# EAGLE board Shopfloor HP Molex NEW (EAGLE 9.6.2)
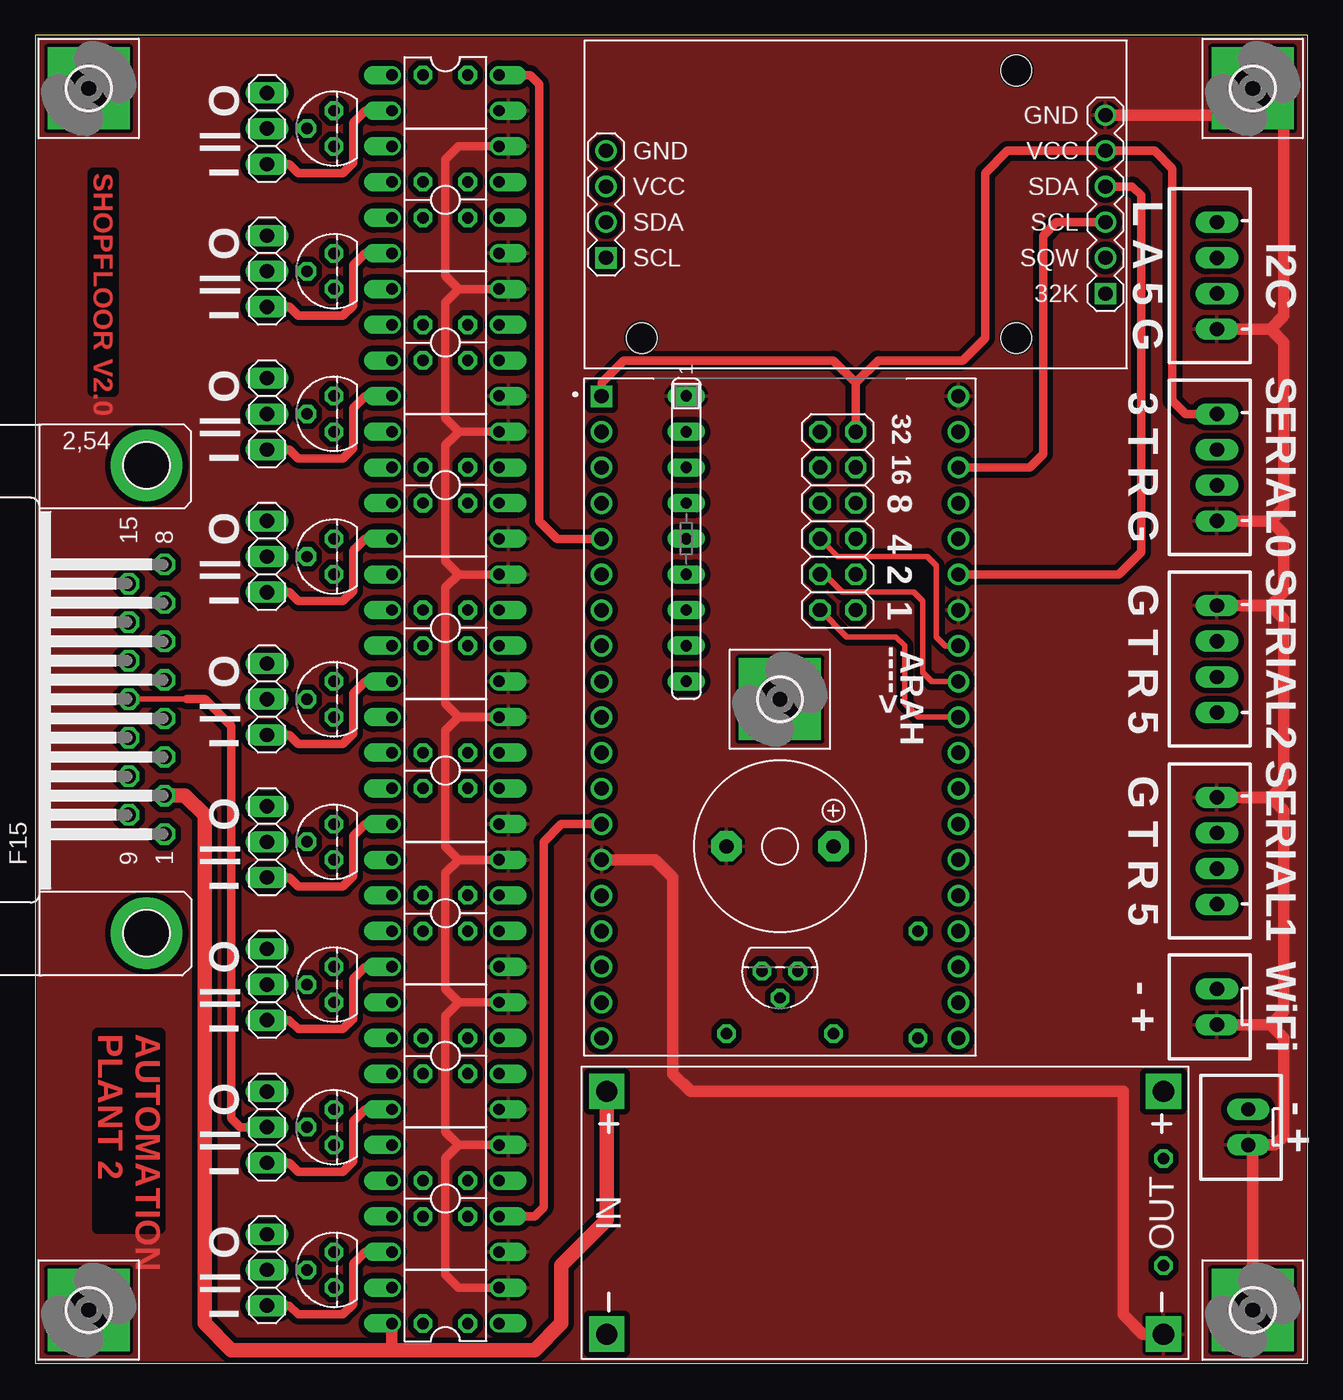
[diagram p0: board, top side]
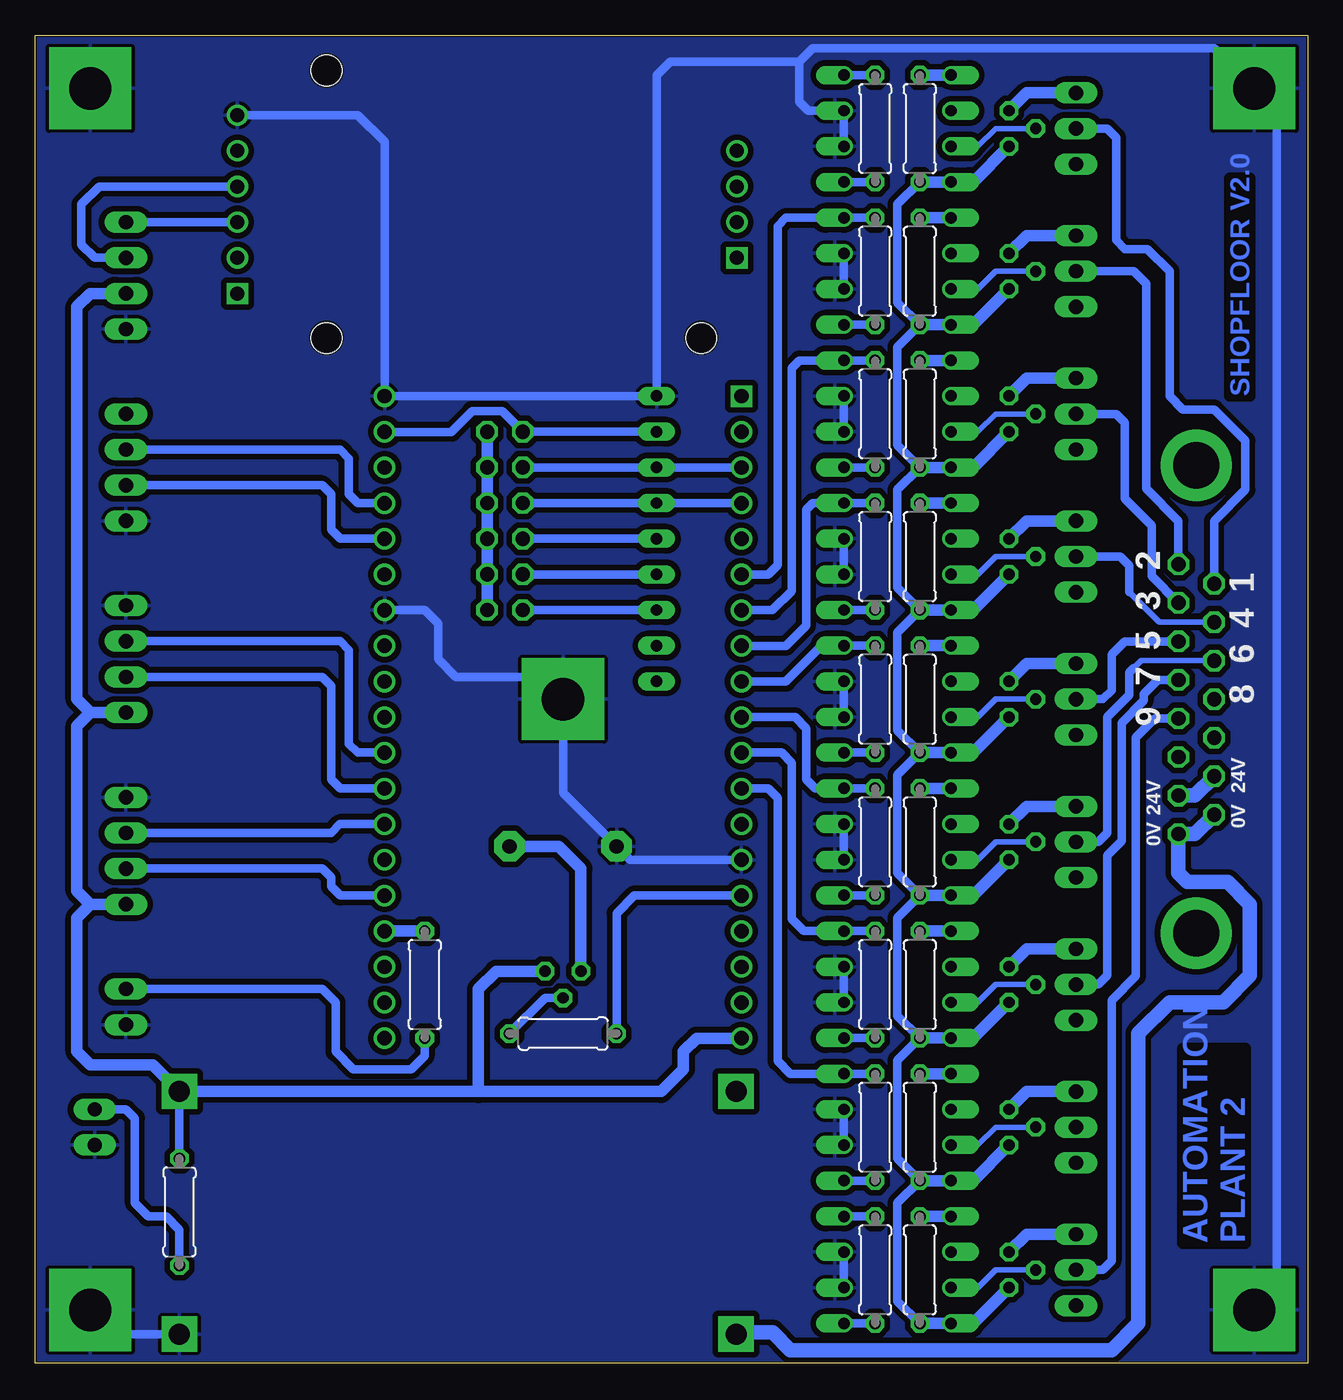
[diagram p1: board, bottom side, seen from below]

Size 90.6 x 94.6 mm. Coordinates in mm from the lower left corner, seen from the top.
Outline: 0,0 90.6,0 90.6,94.6 0,94.6 0,0
Copper layers (1*16): Top 0.035mm / dielectric 1.5mm / Bottom 0.035mm
Design rules "default *": minimum track width 6mil, minimum drill 0.35mm, track to track 16mil, track to pad 16mil, pad to pad 16mil, via to via 16mil, smd to smd 18mil, copper to edge 5mil, drill to drill 6mil, minimum pad ring 10mil, minimum via ring 8mil, stop-mask expansion 4mil, vias tented up to drill 0mil, thermal gap 10mil

## Footprints (pad centres in the part's own frame; a part is rotated, then mirrored left to right if it is on the bottom)
3,0-PAD-SQUARE = drill 3 pad 5.842 square: B3,0 0,0
1X03 = drill 1.016 long: 1 -2.54,0; 2 0,0; 3 2.54,0
2X06 = drill 1.016 octagon: 1 -6.35,-1.27; 2 -6.35,1.27; 3 -3.81,-1.27; 4 -3.81,1.27; 5 -1.27,-1.27; 6 -1.27,1.27; 7 1.27,-1.27; 8 1.27,1.27; 9 3.81,-1.27; 10 3.81,1.27; 11 6.35,-1.27; 12 6.35,1.27
DIL04 = drill 0.813 offset: 1 -1.27,-3.81; 2 1.27,-3.81; 3 1.27,3.81; 4 -1.27,3.81
TO92 = drill 0.813 octagon: 1 1.27,0; 2 0,1.905; 3 -1.27,0
0207/7 = drill 0.813 octagon: 1 -3.81,0; 2 3.81,0
SIL9 = drill 0.813 long: 1 -10.16,0; 2 -7.62,0; 3 -5.08,0; 4 -2.54,0; 5 0,0; 6 2.54,0; 7 5.08,0; 8 7.62,0; 9 10.16,0
F/TMB = drill 1.016 pad 2.159 octagon: + 3.81,0; - -3.81,0
MODULE_ESP32-DEVKITC-32U = drill 1.02 square: 1 -12.7,22.85 | drill 1.02: 2 -12.7,20.31; 3 -12.7,17.77; 4 -12.7,15.23; 5 -12.7,12.69; 6 -12.7,10.15; 7 -12.7,7.61; 8 -12.7,5.07; 9 -12.7,2.53; 10 -12.7,-0.01; 11 -12.7,-2.55; 12 -12.7,-5.09; 13 -12.7,-7.63; 14 -12.7,-10.17; 15 -12.7,-12.71; 16 -12.7,-15.25; 17 -12.7,-17.79; 18 -12.7,-20.33; 19 -12.7,-22.87; 20 12.7,-22.87; 21 12.7,-20.33; 22 12.7,-17.79; 23 12.7,-15.25; 24 12.7,-12.71; 25 12.7,-10.17; 26 12.7,-7.63; 27 12.7,-5.09; 28 12.7,-2.55; 29 12.7,-0.01; 30 12.7,2.53; 31 12.7,5.07; 32 12.7,7.61; 33 12.7,10.15; 34 12.7,12.69; 35 12.7,15.23; 36 12.7,17.77; 37 12.7,20.31; 38 12.7,22.85
DC-DC-STEP-DOWN-LM2596 = drill 1.5 pad 2.5 square: IN+ -19.812,8.636; IN- -19.812,-8.636; OUT+ 19.812,8.636; OUT- 19.812,-8.636
RTC-DS3231-AT24C32 = drill 1 square: J1.1 -17.78,6.35; J2.1 17.78,3.81 | drill 1: J1.2 -17.78,3.81; J1.3 -17.78,1.27; J1.4 -17.78,-1.27; J1.5 -17.78,-3.81; J1.6 -17.78,-6.35; J2.2 17.78,1.27; J2.3 17.78,-1.27; J2.4 17.78,-3.81 | hole 2.2: -11.43,-9.525; -11.43,9.525; 15.24,9.525
F15HP = drill 1.016 octagon: 1 -9.601,-1.27; 2 -6.858,-1.27; 3 -4.115,-1.27; 4 -1.372,-1.27; 5 1.372,-1.27; 6 4.115,-1.27; 7 6.858,-1.27; 8 9.601,-1.27; 9 -8.23,1.27; 10 -5.486,1.27; 11 -2.743,1.27; 12 0,1.27; 13 2.743,1.27; 14 5.486,1.27; 15 8.23,1.27 | drill 3.302 pad 5.08: G1 -16.662,0; G2 16.662,0
JST-XH-04-PACKAGE-LONG-PAD = drill 1.016 long: 1 -3.81,0; 2 -1.27,0; 3 1.27,0; 4 3.81,0
JST-XH-02-PACKAGE-LONG-PAD = drill 1.016 long: 1 -1.27,0; 2 1.27,0

## Placement (x,y rotation side)
H1  MOUNT-PAD-SQUARE3.0  [3,0-PAD-SQUARE]  3.81,3.81 0 top
H2  MOUNT-PAD-SQUARE3.0  [3,0-PAD-SQUARE]  3.81,90.81 0 top
H3  MOUNT-PAD-SQUARE3.0  [3,0-PAD-SQUARE]  53.02,47.31 0 top
H4  MOUNT-PAD-SQUARE3.0  [3,0-PAD-SQUARE]  86.68,3.81 0 top
H5  MOUNT-PAD-SQUARE3.0  [3,0-PAD-SQUARE]  86.68,90.81 0 top
JP1  [1X03]  16.51,77.79 270 top
JP2  [2X06]  57.15,60.01 90 top
JP3  [1X03]  16.51,57.47 270 top
JP5  [1X03]  16.51,37.15 270 top
JP6  [1X03]  16.51,16.83 270 top
JP8  [1X03]  16.51,87.95 270 top
JP9  [1X03]  16.51,67.63 270 top
JP10  [1X03]  16.51,47.31 270 top
JP11  [1X03]  16.51,26.99 270 top
JP12  [1X03]  16.51,6.67 270 top
OK5  PC817  [DIL04]  29.21,75.25 90 top
OK6  PC817  [DIL04]  29.21,80.33 270 top
OK7  PC817  [DIL04]  29.21,54.93 90 top
OK8  PC817  [DIL04]  29.21,60.01 270 top
OK9  PC817  [DIL04]  29.21,34.61 90 top
OK10  PC817  [DIL04]  29.21,39.69 270 top
OK11  PC817  [DIL04]  29.21,14.29 90 top
OK12  PC817  [DIL04]  29.21,19.37 270 top
OK17  PC817  [DIL04]  29.21,85.41 90 top
OK18  PC817  [DIL04]  29.21,90.49 270 top
OK19  PC817  [DIL04]  29.21,65.09 90 top
OK20  PC817  [DIL04]  29.21,70.17 270 top
OK21  PC817  [DIL04]  29.21,44.77 90 top
OK22  PC817  [DIL04]  29.21,49.85 270 top
OK23  PC817  [DIL04]  29.21,24.45 90 top
OK24  PC817  [DIL04]  29.21,29.53 270 top
OK25  PC817  [DIL04]  29.21,4.13 90 top
OK26  PC817  [DIL04]  29.21,9.21 270 top
Q2  BC337  [TO92]  21.27,77.79 90 top
Q3  BC337  [TO92]  21.27,57.47 90 top
Q4  BC337  [TO92]  21.27,37.15 90 top
Q5  BC337  [TO92]  21.27,16.83 90 top
Q6  BC337  [TO92]  53.02,27.94 180 top
Q7  BC337  [TO92]  21.27,87.95 90 top
Q8  BC337  [TO92]  21.27,67.63 90 top
Q9  BC337  [TO92]  21.27,47.31 90 top
Q10  BC337  [TO92]  21.27,26.99 90 top
Q11  BC337  [TO92]  21.27,6.67 90 top
R1  1K  [0207/7]  80.33,10.79 270 bottom
R3  4K7  [0207/7]  27.62,77.79 90 bottom
R4  330  [0207/7]  30.8,57.47 90 bottom
R5  4K7  [0207/7]  27.62,57.47 90 bottom
R6  330  [0207/7]  30.8,37.15 90 bottom
R7  4K7  [0207/7]  27.62,37.15 90 bottom
R8  330  [0207/7]  30.8,16.83 90 bottom
R9  4K7  [0207/7]  27.62,16.83 90 bottom
R10  560  [0207/7]  53.02,23.5 0 bottom
R11  1K  [0207/7]  62.87,26.99 270 bottom
R14  330  [0207/7]  30.8,87.95 90 bottom
R15  4K7  [0207/7]  27.62,87.95 90 bottom
R16  330  [0207/7]  30.8,67.63 90 bottom
R17  4K7  [0207/7]  27.62,67.63 90 bottom
R18  330  [0207/7]  30.8,47.31 90 bottom
R19  4K7  [0207/7]  27.62,47.31 90 bottom
R20  330  [0207/7]  30.8,26.99 90 bottom
R22  4K7  [0207/7]  27.62,26.99 90 bottom
R23  330  [0207/7]  30.8,6.67 90 bottom
R24  4K7  [0207/7]  27.62,6.67 90 bottom
R28  330  [0207/7]  30.8,77.79 90 bottom
RN3  [SIL9]  46.35,58.74 270 top
SG1  F/TMB  [F/TMB]  53.02,36.83 0 top
U1  ESP32-DEVKITC-32U  [MODULE_ESP32-DEVKITC-32U]  53.02,46.04 0 top
U$1  DC-DC-STEP-DOWN-LM2596  [DC-DC-STEP-DOWN-LM2596]  60.52,10.73 0 top
U$3  RTC-DS3231-AT24C32  [RTC-DS3231-AT24C32]  58.42,82.55 180 top
X1  [F15HP]  7.94,47.31 90 top
X2  JST-XH-04-PIN-LONG-PAD  [JST-XH-04-PACKAGE-LONG-PAD]  84.14,77.47 90 top
X3  JST-XH-04-PIN-LONG-PAD  [JST-XH-04-PACKAGE-LONG-PAD]  84.14,63.82 90 top
X4  JST-XH-04-PIN-LONG-PAD  [JST-XH-04-PACKAGE-LONG-PAD]  84.14,50.16 90 top
X5  JST-XH-04-PIN-LONG-PAD  [JST-XH-04-PACKAGE-LONG-PAD]  84.14,36.51 90 top
X6  JST-XH-02-PIN-LONG-PAD  [JST-XH-02-PACKAGE-LONG-PAD]  84.14,25.4 90 top
X7  JST-XH-02-PIN-LONG-PAD  [JST-XH-02-PACKAGE-LONG-PAD]  86.36,16.83 90 top

## Library data of the parts
H1-H5 = holes
JP1-JP3 JP5 JP6 JP8-JP12 = pinhead
OK5-OK12 OK17-OK26 = optocoupler; MPN: PC817X4J000F; OC_FARNELL: 9707727; OC_NEWARK: 97K7059
Q2-Q11 = transistor-npn
R1 R3-R11 R14-R20 R22-R24 R28 = rcl; SPICEPREFIX: R
RN3 = resistor-sil; OC_FARNELL: unknown; OC_NEWARK: unknown
SG1 = buzzer; OC_FARNELL: unknown; OC_NEWARK: unknown
U1 = ESP32-DEVKITC-32U; AVAILABILITY: In Stock; DESCRIPTION: ESP32-WROOM-32UE - Transceiver; 802.11 b/g/n (Wi-Fi, WiFi, WLAN), Bluetooth® Smart Ready 4.x Dual Mode Evaluation Board; MF: Espressif Systems; MP: ESP32-DEVKITC-32U; PACKAGE: None; PRICE: None
U$1 = diy-modules
U$3 = diy-modules-ori
X1 = con-subd; OC_FARNELL: unknown; OC_NEWARK: unknown
X2-X7 = Rembrandt Electronics - JST XH Connectors v1-0

## Nets
0V: U$1.IN- X1.1 X1.9
+3V3: JP2.1 JP2.3 JP2.5 JP2.7 JP2.9 JP2.11 U1.1 U$3.J1.5 X3.4
+5V: Q6.3 R1.1 U1.19 U$1.OUT+ X2.2 X4.1 X5.1
+24V: OK5.4 OK7.4 OK9.4 OK11.4 OK17.4 OK19.4 OK21.4 OK23.4 OK25.4 Q2.3 Q3.3 Q4.3 Q5.3 Q7.3 Q8.3 Q9.3 Q10.3 Q11.3 R3.1 R5.1 R7.1 R9.1 R15.1 R17.1 R19.1 R22.1 R24.1 U$1.IN+ X1.2 X1.10
GND: H1.B3,0 H2.B3,0 H3.B3,0 H4.B3,0 H5.B3,0 OK5.2 OK6.3 OK7.2 OK8.3 OK9.2 OK10.3 OK11.2 OK12.3 OK17.2 OK18.3 OK19.2 OK20.3 OK21.2 OK22.3 OK23.2 OK24.3 OK25.2 OK26.3 RN3.1 SG1.- U1.14 U1.32 U1.38 U$1.OUT- U$3.J1.6 X2.1 X3.1 X4.4 X5.4 X6.1 X7.1
GND.2: U$3.J2.4
N$1: U1.35 X3.3
N$2: JP2.12 RN3.2 U1.37
N$3: R11.2 X6.2
N$4: JP1.2 X1.8
N$5: U1.27 X4.2
N$6: JP2.10 RN3.3 U1.3
N$7: JP2.8 RN3.4 U1.4
N$8: JP2.6 RN3.5 U1.31
N$9: U1.26 X5.3
N$10: U1.24 X5.2
N$11: R11.1 U1.23
N$12: Q6.2 R10.1
N$13: JP2.4 RN3.6 U1.30
N$14: Q6.1 SG1.+
N$15: JP8.2 X1.15
N$16: R1.2 X7.2
N$17: JP2.2 RN3.7 U1.29
N$19: OK6.4 R28.2 U1.6
N$20: OK20.4 R16.2 U1.7
N$21: OK8.4 R4.2 U1.8
N$22: OK22.4 R18.2 U1.9
N$23: OK10.4 R6.2 U1.10
N$24: OK24.4 R20.2 U1.11
N$25: U1.28 X4.3
N$26: OK12.4 R8.2 U1.12
N$27: U1.33 U$3.J1.4 X2.3
N$28: OK26.4 R23.2 U1.13
N$29: U1.36 U$3.J1.3 X2.4
N$30: R10.2 U1.15
N$31: OK5.1 R28.1
N$32: OK5.3 Q2.2
N$33: OK6.1 R3.2
N$34: JP1.1 Q2.1
N$35: JP1.3 OK6.2
N$36: JP9.2 X1.7
N$37: OK7.1 R4.1
N$38: OK7.3 Q3.2
N$39: OK8.1 R5.2
N$40: JP3.1 Q3.1
N$41: JP3.3 OK8.2
N$42: JP10.2 X1.6
N$43: OK9.1 R6.1
N$44: OK9.3 Q4.2
N$45: OK10.1 R7.2
N$46: U1.34 X3.2
N$47: JP5.1 Q4.1
N$48: JP5.3 OK10.2
N$49: JP11.2 X1.5
N$50: OK11.1 R8.1
N$51: OK11.3 Q5.2
N$52: OK12.1 R9.2
N$53: JP6.1 Q5.1
N$54: JP6.3 OK12.2
N$55: OK18.4 R14.2 U1.5
N$56: JP12.2 X1.4
N$63: OK17.1 R14.1
N$64: OK17.3 Q7.2
N$65: OK18.1 R15.2
N$66: JP8.1 Q7.1
N$68: JP8.3 OK18.2
N$69: JP6.2 X1.12
N$70: OK19.1 R16.1
N$71: OK19.3 Q8.2
N$72: OK20.1 R17.2
N$73: JP9.1 Q8.1
N$74: JP9.3 OK20.2
N$75: JP5.2 X1.13
N$76: OK21.1 R18.1
N$77: OK21.3 Q9.2
N$78: OK22.1 R19.2
N$79: JP10.1 Q9.1
N$80: JP10.3 OK22.2
N$81: JP3.2 X1.14
N$82: OK23.1 R20.1
N$83: OK23.3 Q10.2
N$84: OK24.1 R22.2
N$85: JP11.1 Q10.1
N$86: JP11.3 OK24.2
N$88: OK25.1 R23.1
N$89: OK25.3 Q11.2
N$90: OK26.1 R24.2
N$91: JP12.1 Q11.1
N$92: JP12.3 OK26.2
VCC.2: U$3.J2.3

## Tracks (layer width: path | path; a pad name or v marks a point on that pad's centre or on a via)
0V
  Bottom 1.016: X1.9 8.04,37.71 X1.1 9.21,34.92 8.57,34.29 5.71,34.29 4.13,32.7 4.13,27.62 6.03,25.72 9.84,25.72 12.06,23.5 12.06,2.86 13.97,0.95 36.83,0.95 38.1,2.22 40.58,2.22 U$1.IN-
+3V3
  Top 0.61: U1.1 40.32,69.85 41.91,71.44 56.83,71.44 58.42,69.85 | JP2.11 58.42,69.85 | 58.42,69.85 60.01,71.44 66.04,71.44 67.63,73.03 67.63,84.77 69.22,86.36 U$3.J1.5 79.69,86.36 80.96,85.09 80.96,68.58 81.92,67.63 X3.4
  Bottom 0.813: JP2.11 JP2.9 JP2.7 JP2.5 JP2.3 JP2.1
+5V
  Bottom 0.61: U$1.OUT+ R1.1
  Bottom 0.813: U1.19 43.51,23.17 44.45,22.23 44.45,20.95 46.04,19.37 59.05,19.37 | 59.05,19.37 U$1.OUT+ 82.23,21.27 86.68,21.27 87.63,22.23 87.63,31.75 86.68,32.7 | Q6.3 57.78,27.94 59.05,26.67 59.05,19.37 | X5.1 86.68,32.7 | 86.68,32.7 87.63,33.66 87.63,45.4 86.68,46.35 | X4.1 86.68,46.35 | 86.68,46.35 87.63,47.31 87.63,75.25 86.68,76.2 X2.2
+24V
  Top 0.813: OK25.4 25.4,0.95
  Top 1.016: X1.2 10.67,40.45 12.06,39.05 12.06,2.86 13.97,0.95 25.4,0.95 35.56,0.95 37.47,2.86 37.47,6.99 40.7,10.22 U$1.IN+
  Bottom 0.61: R15.1 29.21,82.55 29.21,75.56 R3.1 29.21,72.39 29.21,65.41 R17.1 29.21,62.23 29.21,55.24 R5.1 29.21,52.07 29.21,45.09 R19.1 29.21,41.91 29.21,34.92 R7.1 29.21,31.75 29.21,24.77 R22.1 29.21,21.59 29.21,14.61 R9.1 29.21,11.43 29.21,4.45 R24.1
  Bottom 0.813: R24.1 OK25.4 23.81,2.86 Q11.3 | R9.1 OK11.4 23.81,13.02 Q5.3 | R22.1 OK23.4 23.81,23.18 Q10.3 | R7.1 OK9.4 23.81,33.34 Q4.3 | R19.1 OK21.4 23.81,43.5 Q9.3 | R5.1 OK7.4 23.81,53.66 Q3.3 | R17.1 OK19.4 23.81,63.82 Q8.3 | R3.1 OK5.4 23.81,73.98 Q2.3 | R15.1 OK17.4 23.81,84.14 Q7.3
  Bottom 1.016: X1.10 8.04,40.45 X1.2
GND
  Top 0.61: OK17.2 30.16,86.68 29.21,85.72 29.21,77.47 30.16,76.52 | OK5.2 30.16,76.52 | 30.16,76.52 29.21,75.56 29.21,67.31 30,66.52 | 30,66.52 30.16,66.36 OK19.2 | 30,66.52 30,66.2 29.21,65.41 29.21,57.15 30.16,56.2 | OK7.2 30.16,56.2 | 30.16,56.2 29.21,55.24 29.21,46.99 30.16,46.04 | OK21.2 30.16,46.04 | 30.16,46.04 29.21,45.09 29.21,36.83 30.16,35.88 | OK9.2 30.16,35.88 | 30.16,35.88 29.21,34.92 29.21,26.67 30.16,25.72 | OK23.2 30.16,25.72 | 30.16,25.72 29.21,24.77 29.21,16.51 30.16,15.56 | OK11.2 30.16,15.56 | 30.16,15.56 29.21,14.61 29.21,6.35 30.16,5.4 OK25.2
  Top 0.813: U$1.OUT- 78.87,2.1 77.47,3.49 77.47,19.37 46.67,19.37 45.4,20.64 45.4,34.61 44.14,35.87 U1.14 | H4.B3,0 86.68,15.24 X7.1 88.27,15.56 88.9,16.19 88.9,23.18 87.95,24.13 | 87.95,24.13 X6.1 | 87.95,24.13 88.9,25.08 88.9,39.37 87.95,40.32 | 87.95,53.98 88.9,53.02 88.9,41.27 87.95,40.32 | X4.4 87.95,53.98 | 87.95,53.98 88.9,54.93 88.9,59.05 87.95,60.01 | X3.1 87.95,60.01 | 87.95,60.01 88.9,60.96 88.9,72.71 87.95,73.66 | X2.1 87.95,73.66 | 87.95,73.66 88.9,74.61 88.9,89.53 87.63,90.81 H5.B3,0 84.77,88.9 U$3.J1.6 | 87.95,40.32 X5.4
  Bottom 0.61: U1.14 48.25,35.87 SG1.- 53.02,40.64 H3.B3,0 54.61,48.9 60.64,48.9 61.91,50.16 61.91,52.7 62.87,53.66 U1.32 | U$3.J1.6 67.63,88.9 65.72,87 U1.38 RN3.1 46.35,91.76 45.4,92.71 36.2,92.71 | H1.B3,0 2.22,5.4 2.22,89.22 H2.B3,0 6.67,93.66 35.24,93.66 36.2,92.71 | OK26.3 OK25.2 | OK11.2 OK12.3 | OK23.2 OK24.3 | OK10.3 OK9.2 | OK22.3 OK21.2 | OK7.2 OK8.3 | OK20.3 OK19.2 | OK17.2 OK18.3 35.56,89.22 36.2,89.85 36.2,92.71 | OK6.3 OK5.2 | U$1.OUT- 84.96,2.1 H4.B3,0
  pour Top: 0,94.61 90.49,94.61 90.49,94.3 90.49,0 89.85,0 0,0
  pour Bottom: 0,94.61 90.49,94.61 90.49,94.3 90.49,0 90.17,0 0,0
N$1
  Bottom 0.61: 65.73,61.28 U1.35 67.62,61.27 68.26,61.91 68.26,64.45 68.9,65.09 X3.3
N$2
  Bottom 0.61: RN3.2 JP2.12 57.35,67.83 59.49,67.83 60.97,66.35 U1.37
N$3
  Bottom 0.61: R11.2 62.87,21.91 63.82,20.95 67.94,20.95 69.22,22.23 69.22,25.72 70.17,26.67 X6.2
N$4
  Bottom 0.61: X1.8 9.21,60.01 11.51,62.31 11.51,76.91 12.38,77.79 JP1.2
N$5
  Bottom 0.61: U1.27 65.73,40.96 68.9,40.96 69.53,41.59 69.53,48.26 70.17,48.9 X4.2
N$6
  Bottom 0.61: JP2.10 RN3.3 46.34,63.81 U1.3
N$7
  Bottom 0.61: U1.4 40.33,61.28 RN3.4 JP2.8
N$8
  Top 0.406: JP2.6 57.15,57.47 63.5,57.47 64.14,56.83 64.14,51.75 64.78,51.11 U1.31
  Bottom 0.61: RN3.5 JP2.6
N$9
  Bottom 0.61: U1.26 68.91,38.41 69.53,37.78 X5.3
N$10
  Bottom 0.61: U1.24 68.89,33.33 69.53,33.97 69.53,34.61 70.17,35.24 X5.2
N$11
  Bottom 0.813: R11.1 U1.23
N$12
  Bottom 0.61: Q6.2 54.29,26.04 R10.1
N$13
  Top 0.406: JP2.4 56.2,56.2 57.47,54.93 62.55,54.93 63.18,54.29 63.18,49.21 63.83,48.57 U1.30
  Bottom 0.61: JP2.4 RN3.6
N$14
  Bottom 0.813: Q6.1 51.75,35.24 53.34,36.83 SG1.+
N$15
  Bottom 0.61: X1.15 6.67,60.01 4.45,62.23 4.45,65.72 6.67,67.94 8.89,67.94 9.84,68.9 9.84,77.79 11.43,79.38 13.02,79.38 13.65,80.01 13.65,87.31 14.29,87.95 JP8.2
N$16
  Bottom 0.61: R1.2 80.33,9.53 81.28,10.48 82.55,10.48 83.5,11.43 83.5,17.46 84.14,18.1 X7.2
N$17
  Top 0.406: JP2.2 57.78,51.75 61.28,51.75 61.91,51.12 61.91,46.99 62.88,46.03 U1.29
  Bottom 0.61: RN3.7 JP2.2
N$19
  Bottom 0.61: U1.6 38.43,56.19 37.74,56.87 37.74,81 37.15,81.6 OK6.4 R28.2
N$20
  Bottom 0.61: U1.7 38.11,53.65 36.73,55.03 36.73,70.9 36.2,71.44 OK20.4 R16.2
N$21
  Bottom 0.61: U1.8 37.16,51.11 35.71,52.55 35.71,60.81 35.24,61.28 OK8.4 R4.2
N$22
  Bottom 0.61: U1.9 37.16,48.57 34.61,51.12 OK22.4 R18.2
N$23
  Bottom 0.61: U1.10 36.5,46.03 35.71,45.24 35.71,41.59 35.08,40.96 OK10.4 R6.2
N$24
  Bottom 0.61: U1.11 37.47,43.5 36.73,42.76 36.73,31.65 35.88,30.8 OK24.4 R20.2
N$25
  Bottom 0.61: U1.28 65.73,43.5 67.63,43.5 68.26,44.13 68.26,50.8 68.9,51.44 X4.3
N$26
  Bottom 0.61: U1.12 38.42,40.96 37.74,40.28 37.74,21.55 36.83,20.64 OK12.4 R8.2
N$27
  Top 0.61: U1.33 77.14,56.19 78.74,57.78 78.74,83.19 78.11,83.82 U$3.J1.4
  Bottom 0.61: U$3.J1.4 86.04,83.82 87.31,82.55 87.31,79.69 86.36,78.74 X2.3
N$28
  Top 0.61: U1.13 37.45,38.41 36.2,37.15 36.2,11.11 35.56,10.48 OK26.4
  Bottom 0.61: R23.2 OK26.4
N$29
  Top 0.61: U1.36 70.79,63.81 71.75,64.77 71.75,80.33 72.71,81.28 U$3.J1.3
  Bottom 0.61: U$3.J1.3 X2.4
N$30
  Bottom 0.61: U1.15 47.95,33.33 49.21,32.07 R10.2
N$31
  Bottom 0.61: R28.1 OK5.1
N$32
  Bottom 0.406: Q2.2 22.23,77.79 23.5,76.52 OK5.3
N$33
  Bottom 0.813: R3.2 OK6.1
N$34
  Bottom 0.813: JP1.1 20,80.33 Q2.1
N$35
  Top 0.61: JP1.3 18.1,75.25 18.73,74.61 21.91,74.61 22.64,75.35 22.64,78.21 23.5,79.06 OK6.2
N$36
  Bottom 0.61: X1.7 11.11,56.07 11.11,59.69 13.02,61.59 13.02,66.99 13.65,67.63 JP9.2
N$37
  Bottom 0.61: R4.1 OK7.1
N$38
  Bottom 0.406: Q3.2 22.23,57.47 23.5,56.2 OK7.3
N$39
  Bottom 0.813: R5.2 OK8.1
N$40
  Bottom 0.813: JP3.1 20,60.01 Q3.1
N$41
  Top 0.61: JP3.3 18.1,54.93 18.73,54.29 21.91,54.29 22.64,55.03 22.64,57.89 23.5,58.74 OK8.2
N$42
  Bottom 0.61: X1.6 13.03,51.42 13.97,50.48 13.97,47.94 14.61,47.31 JP10.2
N$43
  Bottom 0.61: R6.1 OK9.1
N$44
  Bottom 0.406: Q4.2 22.23,37.15 23.5,35.88 OK9.3
N$45
  Bottom 0.813: R7.2 OK10.1
N$46
  Bottom 0.61: U1.34 65.73,58.74 68.9,58.74 69.53,59.37 69.53,61.91 70.17,62.55 X3.2
N$47
  Bottom 0.813: JP5.1 20,39.69 Q4.1
N$48
  Top 0.61: JP5.3 18.1,34.61 18.73,33.97 21.91,33.97 22.64,34.71 22.64,37.57 23.5,38.42 OK10.2
N$49
  Bottom 0.61: X1.5 10.69,48.68 11.68,47.69 11.68,47.2 13.26,45.63 13.26,37.22 14.29,36.2 14.29,35.23 14.28,35.22 14.28,28.92 14.29,28.91 14.29,27.62 14.92,26.99 JP11.2
N$50
  Bottom 0.61: R8.1 OK11.1
N$51
  Bottom 0.406: Q5.2 22.23,16.83 23.5,15.56 OK11.3
N$52
  Bottom 0.813: R9.2 OK12.1
N$53
  Bottom 0.813: JP6.1 20,19.37 Q5.1
N$54
  Top 0.61: JP6.3 18.1,14.29 18.73,13.65 21.91,13.65 22.64,14.39 22.64,17.25 23.5,18.1 OK12.2
N$55
  Top 0.61: U1.5 37.16,58.73 35.88,60.01 35.88,87.31 35.88,88.58 35.88,91.12 35.24,91.76 OK18.4
  Bottom 0.61: R14.2 OK18.4
N$56
  Bottom 0.61: X1.4 10.9,45.94 12.24,44.59 12.24,27.59 13.97,25.87 13.97,7.3 14.61,6.67 JP12.2
N$63
  Bottom 0.61: R14.1 OK17.1
N$64
  Bottom 0.406: Q7.2 22.23,87.95 23.5,86.68 OK17.3
N$65
  Bottom 0.813: R15.2 OK18.1
N$66
  Bottom 0.813: JP8.1 20,90.49 Q7.1
N$68
  Top 0.61: JP8.3 18.1,85.41 18.73,84.77 21.91,84.77 22.64,85.51 22.64,88.37 23.5,89.22 OK18.2
N$69
  Top 0.406: X1.12 10.79,47.31
  Top 0.61: 10.79,47.31 12.06,47.31 13.97,45.4 13.97,17.46 14.61,16.83 JP6.2
N$70
  Bottom 0.61: R16.1 OK19.1
N$71
  Bottom 0.406: Q8.2 22.23,67.63 23.5,66.36 OK19.3
N$72
  Bottom 0.813: R17.2 OK20.1
N$73
  Bottom 0.813: JP9.1 20,70.17 Q8.1
N$74
  Top 0.61: JP9.3 18.1,65.09 18.73,64.45 21.91,64.45 22.64,65.19 22.64,68.05 23.5,68.9 OK20.2
N$75
  Bottom 0.406: X1.13 11.86,50.05 12.38,49.53
  Bottom 0.61: 12.38,49.53 12.7,49.21 12.7,47.62 14.28,46.05 14.28,44.16 14.29,44.15 14.29,40.31 14.28,40.3 14.28,37.8 14.92,37.15 JP5.2
N$76
  Bottom 0.61: R18.1 OK21.1
N$77
  Bottom 0.406: Q9.2 22.23,47.31 23.5,46.04 OK21.3
N$78
  Bottom 0.813: R19.2 OK22.1
N$79
  Bottom 0.813: JP10.1 20,49.85 Q9.1
N$80
  Top 0.61: JP10.3 18.1,44.77 18.73,44.13 21.91,44.13 22.64,44.87 22.64,47.73 23.5,48.58 OK22.2
N$81
  Bottom 0.406: X1.14 10.57,52.79 12.7,54.93
  Bottom 0.61: JP3.2 13.34,57.47 12.7,56.83 12.7,54.93
N$82
  Bottom 0.61: R20.1 OK23.1
N$83
  Bottom 0.406: Q10.2 22.23,26.99 23.5,25.72 OK23.3
N$84
  Bottom 0.813: R22.2 OK24.1
N$85
  Bottom 0.813: JP11.1 20,29.53 Q10.1
N$86
  Top 0.61: JP11.3 18.1,24.45 18.73,23.81 21.91,23.81 22.64,24.55 22.64,27.41 23.5,28.26 OK24.2
N$88
  Bottom 0.61: R23.1 OK25.1
N$89
  Bottom 0.406: Q11.2 22.23,6.67 23.5,5.4 OK25.3
N$90
  Bottom 0.813: R24.2 OK26.1
N$91
  Bottom 0.813: JP12.1 20,9.21 Q11.1
N$92
  Top 0.61: JP12.3 18.1,4.13 18.73,3.49 21.91,3.49 22.64,4.23 22.64,7.09 23.5,7.94 OK26.2

## Text on the board
Top: SHOPFLOOR V2.0 | AUTOMATION / PLANT 2
Bottom: SHOPFLOOR V2.0 | AUTOMATION / PLANT 2
tNames: O || I | O || I | L A 5 G | I2C | O || I | 32 | 16 | 3 T R G | SERIAL0 | 8 | O || I | 4 | 2 | 1 | ----> | ARAH | O || I | G T R 5 | SERIAL2 | O || I | G T R 5 | SERIAL1 | O || I | - + | WiFi | O || I | - + | O || I
bNames: 2 | 1 | 3 | 4 | 5 | 6 | 7 | 8 | 9 | 24V | 24V | 0V | 0V
_tNames: RN3 | RN3 | X1 | X1 | JP1 | JP1 | J4 | J4 | J6 | J6 | JP2 | JP2 | JP3 | JP3 | SG1 | SG1 | J5 | J5 | U$2 | U$2 | J7 | J7 | X2 | X2 | J8 | J8 | U$1 | U$1 | U1 | U1
_bNames: U$3 | U$3